# EAGLE board SimulatorT2PowerRevC_panelized (EAGLE 7.7.0)
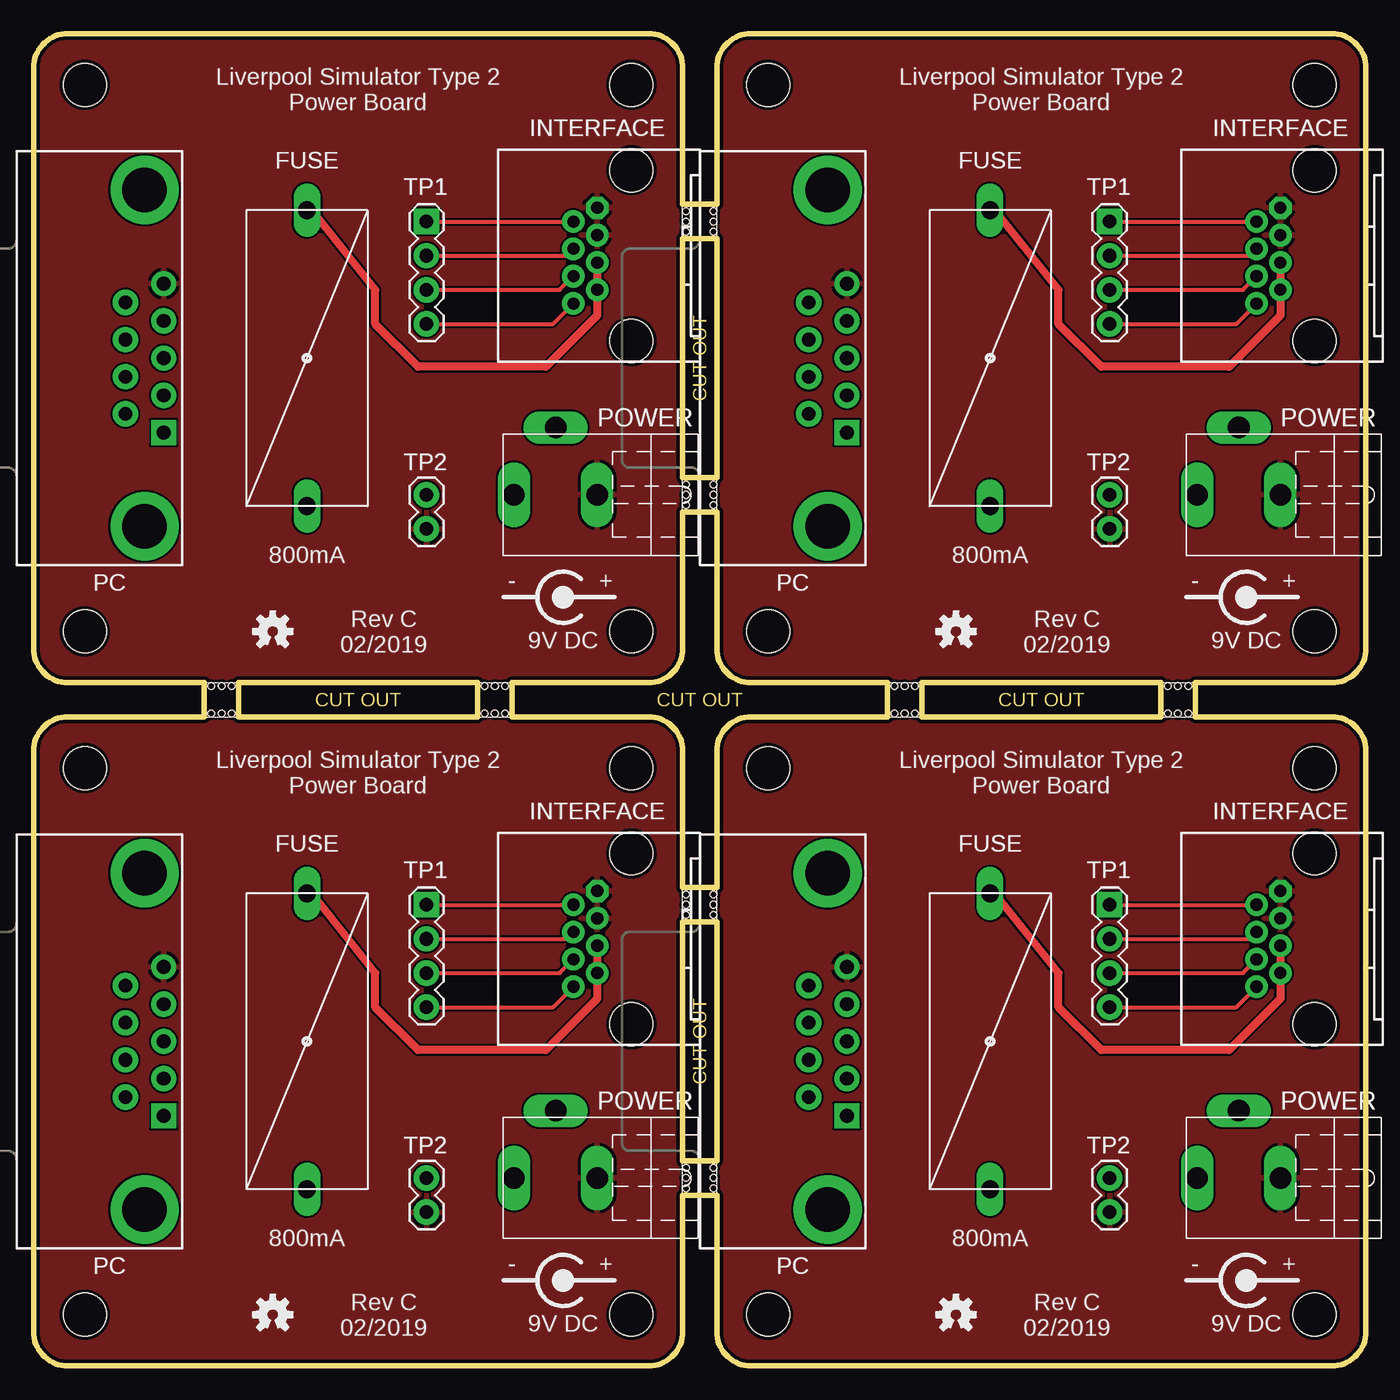
[diagram p0: board, top side]
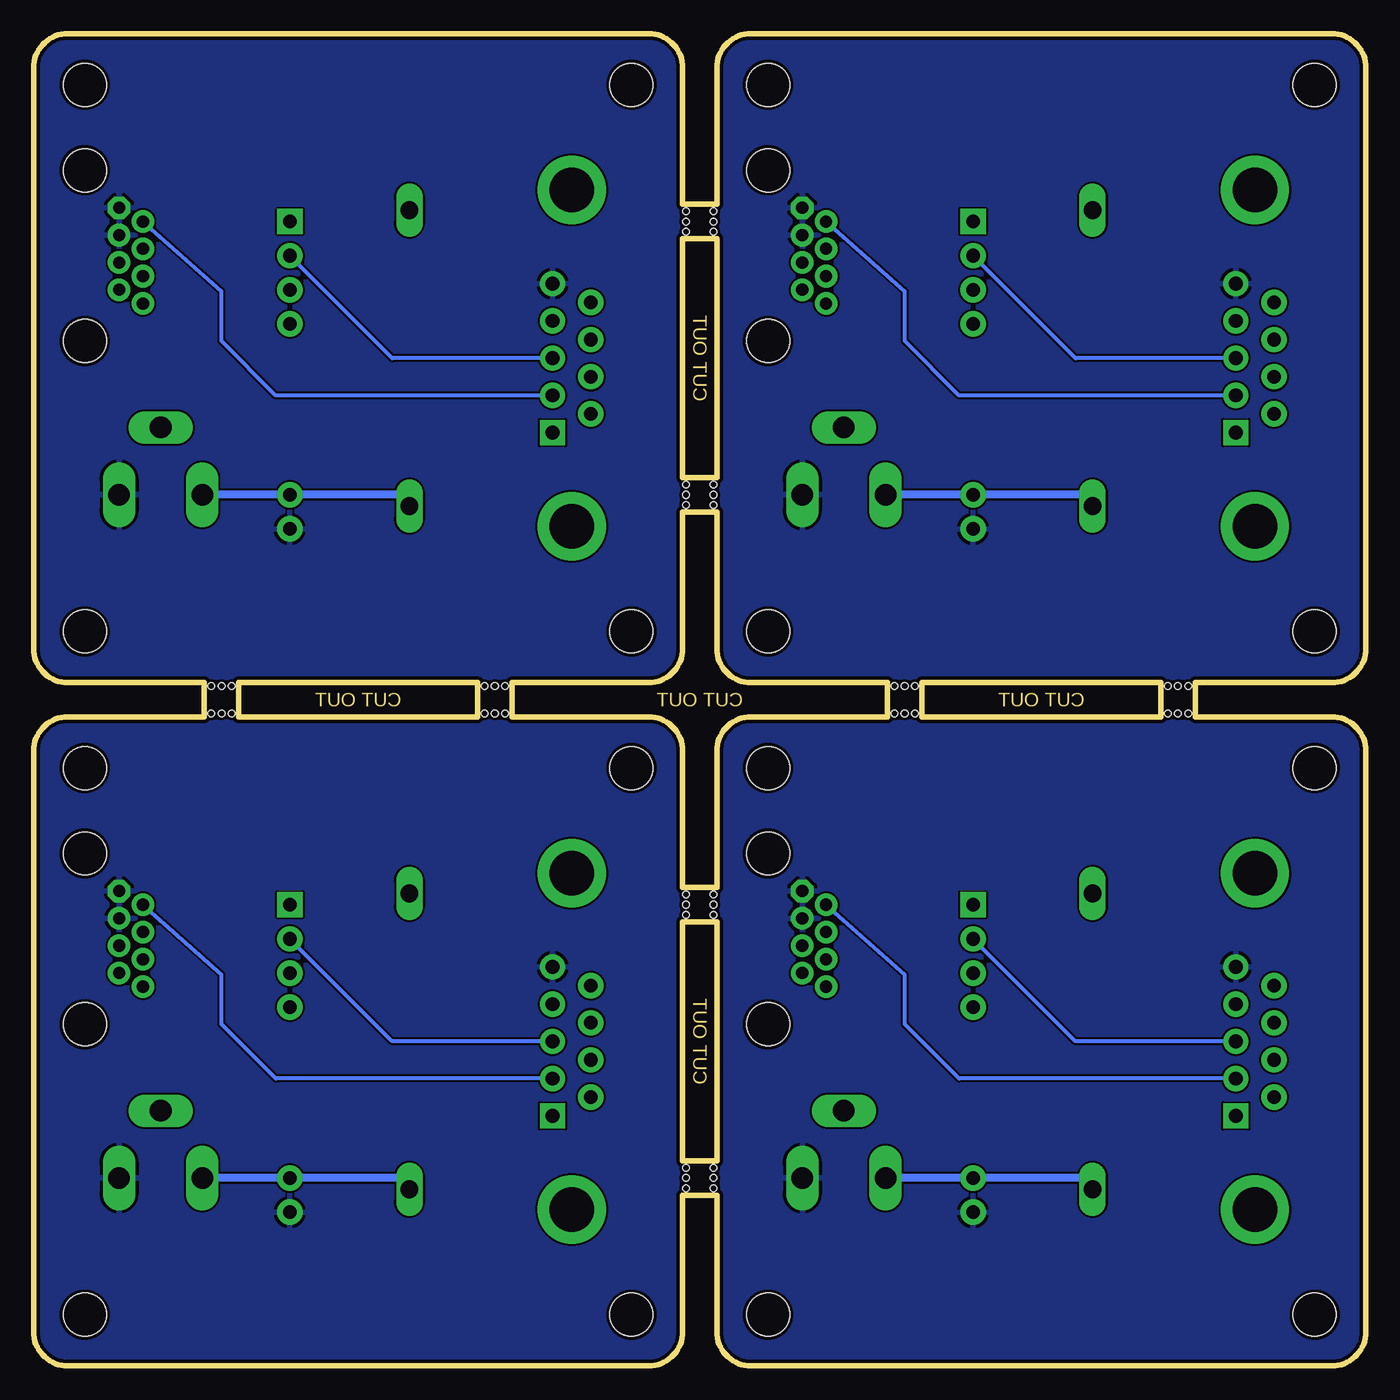
[diagram p1: board, bottom side, seen from below]

Size 99.06 x 99.06 mm. Coordinates in mm from the lower left corner, seen from the top.
Outline: 0,2.54 0,45.72 arc-90 2.54,48.26 12.7,48.26 12.7,50.8 2.54,50.8 arc-90 0,53.34 0,96.52 arc-90 2.54,99.06 45.72,99.06 arc-90 48.26,96.52 48.26,86.36 50.8,86.36 50.8,96.52 arc-90 53.34,99.06 96.52,99.06 arc-90 99.06,96.52 99.06,53.34 arc-90 96.52,50.8 86.36,50.8 86.36,48.26 96.52,48.26 arc-90 99.06,45.72 99.06,2.54 arc-90 96.52,0 53.34,0 arc-90 50.8,2.54 50.8,12.7 48.26,12.7 48.26,2.54 arc-90 45.72,0 2.54,0 arc-90 0,2.54
Outline: 45.72,48.26 arc-90 48.26,45.72 48.26,35.56 50.8,35.56 50.8,45.72 arc-90 53.34,48.26 63.5,48.26 63.5,50.8 53.34,50.8 arc-90 50.8,53.34 50.8,63.5 48.26,63.5 48.26,53.34 arc-90 45.72,50.8 35.56,50.8 35.56,48.26 45.72,48.26
Outline: 15.24,50.8 33.02,50.8 33.02,48.26 15.24,48.26 15.24,50.8
Outline: 66.04,50.8 83.82,50.8 83.82,48.26 66.04,48.26 66.04,50.8
Outline: 48.26,83.82 50.8,83.82 50.8,66.04 48.26,66.04 48.26,83.82
Outline: 48.26,33.02 50.8,33.02 50.8,15.24 48.26,15.24 48.26,33.02
Copper layers (1*16): Top 0.035mm / dielectric 1.5mm / Bottom 0.035mm
Design rules "SeeedStudio_2layer_DRU_no_angle_20140221": minimum track width 6mil, minimum drill 12mil, track to track 6mil, track to pad 6mil, pad to pad 6mil, via to via 6mil, smd to smd 0mil, copper to edge 10mil, drill to drill 10mil, minimum pad ring 10mil, minimum via ring 6mil, stop-mask expansion 2mil, vias tented up to drill 100mil, thermal gap 10mil
Holes 3.2 mm at 3.81,3.81 3.81,44.45 44.45,44.45 44.45,3.81 54.61,3.81 54.61,44.45 95.25,44.45 95.25,3.81 3.81,54.61 3.81,95.25 44.45,95.25 44.45,54.61 54.61,54.61 54.61,95.25 95.25,95.25 95.25,54.61

## Footprints (pad centres in the part's own frame; a part is rotated, then mirrored left to right if it is on the bottom)
STAMP_HOLES = hole 0.5: 0,-1.016; 0.762,-1.016; -0.762,-1.016; -0.762,1.016; 0,1.016; 0.762,1.016
MCOMP-FUSE-HOLDER-PCB = drill 1.321 long: 1 -11.001,0; 2 11.001,0
RJ45-RJHSE-5080 = drill 0.9 pad 1.676 octagon: 1 3.556,2.54 | drill 0.9 pad 1.676: 2 2.54,4.318; 3 1.524,2.54; 4 0.508,4.318; 5 -0.508,2.54; 6 -1.524,4.318; 7 -2.54,2.54; 8 -3.556,4.318 | hole 3.2: -6.35,0; 6.35,0
MULTICOMP-DB9-FEMALE-PCB-90DEG = drill 1.016 pad 1.88 square: 1 -5.54,-10.945 | drill 1.016 pad 1.88: 2 -2.77,-10.945; 3 0,-10.945; 4 2.77,-10.945; 5 5.54,-10.945; 6 -4.15,-8.105; 7 -1.38,-8.105; 8 1.38,-8.105; 9 4.15,-8.105 | drill 3.302 pad 5.08: G1 -12.496,-9.525; G2 12.496,-9.525
CLIFF-FC681465P-DC-JACK = drill 1.6 long: 1 6.2,0; 2 3.099,-5.001; 3 0,0
1X04 = drill 1.016 pad 1.88 square: 1 0,0 | drill 1.016 pad 1.88: 2 2.54,0; 3 5.08,0; 4 7.62,0
1X02 = drill 1.016 pad 1.88: 1 0,0; 2 2.54,0

## Placement (x,y rotation side)
E$1  [STAMP_HOLES]  64.77,49.53 0 top
E$2  [STAMP_HOLES]  85.09,49.53 0 top
E$3  [STAMP_HOLES]  13.97,49.53 0 top
E$4  [STAMP_HOLES]  34.29,49.53 0 top
E$5  [STAMP_HOLES]  49.53,64.77 90 top
E$6  [STAMP_HOLES]  49.53,85.09 90 top
E$7  [STAMP_HOLES]  49.53,34.29 90 top
E$8  [STAMP_HOLES]  49.53,13.97 90 top
FUSE  800mA  [MCOMP-FUSE-HOLDER-PCB]  20.32,24.13 270 top
FUSE_1  800mA  [MCOMP-FUSE-HOLDER-PCB]  71.12,24.13 270 top
FUSE_2  800mA  [MCOMP-FUSE-HOLDER-PCB]  20.32,74.93 270 top
FUSE_3  800mA  [MCOMP-FUSE-HOLDER-PCB]  71.12,74.93 270 top
INTERFACE  RJ45-RJHSE-X08090DEG  [RJ45-RJHSE-5080]  44.45,31.75 90 top
INTERFACE_1  RJ45-RJHSE-X08090DEG  [RJ45-RJHSE-5080]  95.25,31.75 90 top
INTERFACE_2  RJ45-RJHSE-X08090DEG  [RJ45-RJHSE-5080]  44.45,82.55 90 top
INTERFACE_3  RJ45-RJHSE-X08090DEG  [RJ45-RJHSE-5080]  95.25,82.55 90 top
LOGO1  OSHW-LOGOS  [OSHW-LOGO-S]  17.78,3.81 0 top
LOGO1_1  OSHW-LOGOS  [OSHW-LOGO-S]  68.58,3.81 0 top
LOGO1_2  OSHW-LOGOS  [OSHW-LOGO-S]  17.78,54.61 0 top
LOGO1_3  OSHW-LOGOS  [OSHW-LOGO-S]  68.58,54.61 0 top
PC  [MULTICOMP-DB9-FEMALE-PCB-90DEG]  -1.27,24.13 90 top
PC_1  [MULTICOMP-DB9-FEMALE-PCB-90DEG]  49.53,24.13 90 top
PC_2  [MULTICOMP-DB9-FEMALE-PCB-90DEG]  -1.27,74.93 90 top
PC_3  [MULTICOMP-DB9-FEMALE-PCB-90DEG]  49.53,74.93 90 top
POWER  9V DC  [CLIFF-FC681465P-DC-JACK]  41.91,13.97 180 top
POWER_1  9V DC  [CLIFF-FC681465P-DC-JACK]  92.71,13.97 180 top
POWER_2  9V DC  [CLIFF-FC681465P-DC-JACK]  41.91,64.77 180 top
POWER_3  9V DC  [CLIFF-FC681465P-DC-JACK]  92.71,64.77 180 top
TP1  [1X04]  29.21,34.29 270 top
TP1_1  [1X04]  80.01,34.29 270 top
TP1_2  [1X04]  29.21,85.09 270 top
TP1_3  [1X04]  80.01,85.09 270 top
TP2  [1X02]  29.21,13.97 270 top
TP2_1  [1X02]  80.01,13.97 270 top
TP2_2  [1X02]  29.21,64.77 270 top
TP2_3  [1X02]  80.01,64.77 270 top
U$1  [CENTRE-POS-SILK]  39.37,6.35 0 top
U$1_1  [CENTRE-POS-SILK]  90.17,6.35 0 top
U$1_2  [CENTRE-POS-SILK]  39.37,57.15 0 top
U$1_3  [CENTRE-POS-SILK]  90.17,57.15 0 top

## Library data of the parts
E$1-E$8 FUSE INTERFACE PC POWER U$1 U$1_1-U$1_3 = AIC_Custom
FUSE_1-FUSE_3 = AIC_Custom; NAME1: FUSE
INTERFACE_1-INTERFACE_3 = AIC_Custom; NAME1: INTERFACE
LOGO1 LOGO1_1-LOGO1_3 = SparkFun-Aesthetics
PC_1-PC_3 = AIC_Custom; NAME1: PC
POWER_1-POWER_3 = AIC_Custom; NAME1: POWER
TP1 TP2 = SparkFun-Connectors
TP1_1-TP1_3 = SparkFun-Connectors; NAME1: TP1
TP2_1-TP2_3 = SparkFun-Connectors; NAME1: TP2

## Nets
GND: INTERFACE.1 INTERFACE.3 PC.5 POWER.3 TP2.2
GND1: INTERFACE_1.1 INTERFACE_1.3 PC_1.5 POWER_1.3 TP2_1.2
GND2: INTERFACE_2.1 INTERFACE_2.3 PC_2.5 POWER_2.3 TP2_2.2
GND3: INTERFACE_3.1 INTERFACE_3.3 PC_3.5 POWER_3.3 TP2_3.2
P8: INTERFACE.8 TP1.4
P81: INTERFACE_1.8 TP1_1.4
P82: INTERFACE_2.8 TP1_2.4
P83: INTERFACE_3.8 TP1_3.4
RXD: INTERFACE.4 PC.3 TP1.2
RXD1: INTERFACE_1.4 PC_1.3 TP1_1.2
RXD2: INTERFACE_2.4 PC_2.3 TP1_2.2
RXD3: INTERFACE_3.4 PC_3.3 TP1_3.2
TX2: INTERFACE.6 TP1.3
TX21: INTERFACE_1.6 TP1_1.3
TX22: INTERFACE_2.6 TP1_2.3
TX23: INTERFACE_3.6 TP1_3.3
TXD: INTERFACE.2 PC.2 TP1.1
TXD1: INTERFACE_1.2 PC_1.2 TP1_1.1
TXD2: INTERFACE_2.2 PC_2.2 TP1_2.1
TXD3: INTERFACE_3.2 PC_3.2 TP1_3.1
VIN: FUSE.2 POWER.1 TP2.1
VIN1: FUSE_1.2 POWER_1.1 TP2_1.1
VIN2: FUSE.1 INTERFACE.5 INTERFACE.7
VIN3: FUSE_2.2 POWER_2.1 TP2_2.1
VIN4: FUSE_3.2 POWER_3.1 TP2_3.1
VIN21: FUSE_1.1 INTERFACE_1.5 INTERFACE_1.7
VIN22: FUSE_2.1 INTERFACE_2.5 INTERFACE_2.7
VIN23: FUSE_3.1 INTERFACE_3.5 INTERFACE_3.7

## Tracks (layer width: path | path; a pad name or v marks a point on that pad's centre or on a via)
GND
  pour Bottom: 2.54,48.26 45.72,48.26 arc-90 48.26,45.72 48.26,2.54 arc-90 45.72,0 2.54,0 arc-90 0,2.54 0,45.72 arc-90
  pour Top: 2.54,48.26 45.72,48.26 arc-90 48.26,45.72 48.26,2.54 arc-90 45.72,0 2.54,0 arc-90 0,2.54 0,45.72 arc-90
GND1
  pour Bottom: 53.34,48.26 96.52,48.26 arc-90 99.06,45.72 99.06,2.54 arc-90 96.52,0 53.34,0 arc-90 50.8,2.54 50.8,45.72 arc-90
  pour Top: 53.34,48.26 96.52,48.26 arc-90 99.06,45.72 99.06,2.54 arc-90 96.52,0 53.34,0 arc-90 50.8,2.54 50.8,45.72 arc-90
GND2
  pour Bottom: 2.54,99.06 45.72,99.06 arc-90 48.26,96.52 48.26,53.34 arc-90 45.72,50.8 2.54,50.8 arc-90 0,53.34 0,96.52 arc-90
  pour Top: 2.54,99.06 45.72,99.06 arc-90 48.26,96.52 48.26,53.34 arc-90 45.72,50.8 2.54,50.8 arc-90 0,53.34 0,96.52 arc-90
GND3
  pour Bottom: 53.34,99.06 96.52,99.06 arc-90 99.06,96.52 99.06,53.34 arc-90 96.52,50.8 53.34,50.8 arc-90 50.8,53.34 50.8,96.52 arc-90
  pour Top: 53.34,99.06 96.52,99.06 arc-90 99.06,96.52 99.06,53.34 arc-90 96.52,50.8 53.34,50.8 arc-90 50.8,53.34 50.8,96.52 arc-90
P8
  Top 0.305: TP1.4 38.61,26.67 INTERFACE.8
P81
  Top 0.305: TP1_1.4 89.41,26.67 INTERFACE_1.8
P82
  Top 0.305: TP1_2.4 38.61,77.47 INTERFACE_2.8
P83
  Top 0.305: TP1_3.4 89.41,77.47 INTERFACE_3.8
RXD
  Top 0.305: TP1.2 39.62,31.75 INTERFACE.4
  Bottom 0.305: PC.3 21.59,24.13 TP1.2
RXD1
  Top 0.305: TP1_1.2 90.42,31.75 INTERFACE_1.4
  Bottom 0.305: PC_1.3 72.39,24.13 TP1_1.2
RXD2
  Top 0.305: TP1_2.2 39.62,82.55 INTERFACE_2.4
  Bottom 0.305: PC_2.3 21.59,74.93 TP1_2.2
RXD3
  Top 0.305: TP1_3.2 90.42,82.55 INTERFACE_3.4
  Bottom 0.305: PC_3.3 72.39,74.93 TP1_3.2
TX2
  Top 0.305: TP1.3 39.12,29.21 INTERFACE.6
TX21
  Top 0.305: TP1_1.3 89.92,29.21 INTERFACE_1.6
TX22
  Top 0.305: TP1_2.3 39.12,80.01 INTERFACE_2.6
TX23
  Top 0.305: TP1_3.3 89.92,80.01 INTERFACE_3.6
TXD
  Top 0.305: TP1.1 INTERFACE.2
  Bottom 0.305: PC.2 30.25,21.36 34.29,25.4 34.29,29.08 INTERFACE.2
TXD1
  Top 0.305: TP1_1.1 INTERFACE_1.2
  Bottom 0.305: PC_1.2 81.05,21.36 85.09,25.4 85.09,29.08 INTERFACE_1.2
TXD2
  Top 0.305: TP1_2.1 INTERFACE_2.2
  Bottom 0.305: PC_2.2 30.25,72.16 34.29,76.2 34.29,79.88 INTERFACE_2.2
TXD3
  Top 0.305: TP1_3.1 INTERFACE_3.2
  Bottom 0.305: PC_3.2 81.05,72.16 85.09,76.2 85.09,79.88 INTERFACE_3.2
VIN
  Bottom 0.61: 29.21,13.76 TP2.1 | TP2.1 POWER.1 | FUSE.2 21.16,13.97 TP2.1
VIN1
  Bottom 0.61: 80.01,13.76 TP2_1.1 | TP2_1.1 POWER_1.1 | FUSE_1.2 71.96,13.97 TP2_1.1
VIN2
  Top 0.152: 20.32,35.56 FUSE.1
  Top 0.61: INTERFACE.5 INTERFACE.7 41.91,27.3 38.1,23.5 28.57,23.5 25.4,26.67 25.4,29.21 20.32,35.56
VIN3
  Bottom 0.61: 29.21,64.56 TP2_2.1 | TP2_2.1 POWER_2.1 | FUSE_2.2 21.16,64.77 TP2_2.1
VIN4
  Bottom 0.61: 80.01,64.56 TP2_3.1 | TP2_3.1 POWER_3.1 | FUSE_3.2 71.96,64.77 TP2_3.1
VIN21
  Top 0.152: 71.12,35.56 FUSE_1.1
  Top 0.61: INTERFACE_1.5 INTERFACE_1.7 92.71,27.3 88.9,23.5 79.38,23.5 76.2,26.67 76.2,29.21 71.12,35.56
VIN22
  Top 0.152: 20.32,86.36 FUSE_2.1
  Top 0.61: INTERFACE_2.5 INTERFACE_2.7 41.91,78.11 38.1,74.3 28.57,74.3 25.4,77.47 25.4,80.01 20.32,86.36
VIN23
  Top 0.152: 71.12,86.36 FUSE_3.1
  Top 0.61: INTERFACE_3.5 INTERFACE_3.7 92.71,78.11 88.9,74.3 79.38,74.3 76.2,77.47 76.2,80.01 71.12,86.36

## Text on the board
Dimension: CUT OUT | CUT OUT | CUT OUT | CUT OUT | CUT OUT
tPlace: Liverpool Simulator Type 2 / Power Board | Liverpool Simulator Type 2 / Power Board | Rev C / 02/2019 | Rev C / 02/2019 | Liverpool Simulator Type 2 / Power Board | Liverpool Simulator Type 2 / Power Board | Rev C / 02/2019 | Rev C / 02/2019
_tNames: INTERFACE | INTERFACE | FUSE | FUSE | TP1 | TP1 | POWER | POWER | TP2 | TP2 | PC | PC | INTERFACE | INTERFACE | FUSE | FUSE | TP1 | TP1 | POWER | POWER | TP2 | TP2 | PC | PC